# EAGLE board data_proV1.1 (EAGLE 7.6.0)

Size 98.73 x 80 mm. Coordinates in mm from the lower left corner, seen from the top.
Outline: 0,0 98.73,0 98.73,80 0,80 0,0
Copper layers (1*16): Top 0.035mm / dielectric 1.5mm / Bottom 0.035mm
Design rules "default": minimum track width 10mil, minimum drill 24mil, track to track 8mil, track to pad 8mil, pad to pad 8mil, via to via 8mil, smd to smd 8mil, copper to edge 40mil, drill to drill 8mil, minimum pad ring 10mil, minimum via ring 8mil, stop-mask expansion 4mil, vias tented up to drill 0mil, thermal gap 10mil

## Footprints (pad centres in the part's own frame; a part is rotated, then mirrored left to right if it is on the bottom)
CR2032-SMD = smd 5.08 x 5.08: +$1 -12.7,0; +$2 12.7,0 | smd 4.064 x 4.064: - 0,0
C0805 = smd 1.3 x 1.5: 1 -0.95,0; 2 0.95,0
0805 = smd 0.8 x 1.2: 1 -0.9,0; 2 0.9,0
0603-CAP = smd 1.1 x 1: 1 -0.85,0; 2 0.85,0
1206 = smd 1.6 x 1.8: 1 -1.4,0; 2 1.4,0
SOD-323F = smd 1 x 0.8: A -1,0; C 1,0
SMB-DIODE = smd 2.4 x 2.4: A 2.2,0; C -2.2,0
DIL16 = drill 0.813 long: 1 -8.89,-3.81; 2 -6.35,-3.81; 3 -3.81,-3.81; 4 -1.27,-3.81; 5 1.27,-3.81; 6 3.81,-3.81; 7 6.35,-3.81; 8 8.89,-3.81; 9 8.89,3.81; 10 6.35,3.81; 11 3.81,3.81; 12 1.27,3.81; 13 -1.27,3.81; 14 -3.81,3.81; 15 -6.35,3.81; 16 -8.89,3.81
DIL08 = drill 0.813 long: 1 -3.81,-3.81; 2 -1.27,-3.81; 3 1.27,-3.81; 4 3.81,-3.81; 5 3.81,3.81; 6 1.27,3.81; 7 -1.27,3.81; 8 -3.81,3.81
2X20-SHROUDED = drill 1.016 pad 1.88 octagon: 1 -1.27,24.13; 2 1.27,24.13; 3 -1.27,21.59; 4 1.27,21.59; 5 -1.27,19.05; 6 1.27,19.05; 7 -1.27,16.51; 8 1.27,16.51; 9 -1.27,13.97; 10 1.27,13.97; 11 -1.27,11.43; 12 1.27,11.43; 13 -1.27,8.89; 14 1.27,8.89; 15 -1.27,6.35; 16 1.27,6.35; 17 -1.27,3.81; 18 1.27,3.81; 19 -1.27,1.27; 20 1.27,1.27; 21 -1.27,-1.27; 22 1.27,-1.27; 23 -1.27,-3.81; 24 1.27,-3.81; 25 -1.27,-6.35; 26 1.27,-6.35; 27 -1.27,-8.89; 28 1.27,-8.89; 29 -1.27,-11.43; 30 1.27,-11.43; 31 -1.27,-13.97; 32 1.27,-13.97; 33 -1.27,-16.51; 34 1.27,-16.51; 35 -1.27,-19.05; 36 1.27,-19.05; 37 -1.27,-21.59; 38 1.27,-21.59; 39 -1.27,-24.13; 40 1.27,-24.13
BTA = drill 1.4 pad 2.54 square: 1 4.75,9 | drill 1.4 pad 2.54: 2 3.25,6; 3 1.75,9; 4 0.25,6; 5 -1.25,9; 6 -2.75,6 | hole 3.2: 6.45,0; -6.45,0
BTD = drill 1.4 pad 2.54 square: 1 -4.75,6 | drill 1.4 pad 2.54: 2 -3.25,9; 3 -1.75,6; 4 -0.25,9; 5 1.25,6; 6 2.75,9 | hole 3.2: 6.45,0; -6.45,0
2X04 = drill 1.016 octagon: 1 -3.81,-1.27; 2 -3.81,1.27; 3 -1.27,-1.27; 4 -1.27,1.27; 5 1.27,-1.27; 6 1.27,1.27; 7 3.81,-1.27; 8 3.81,1.27
2X04' = drill 1.016 pad 1.676 octagon: 1 -3.81,-1.27; 2 -3.81,1.27; 3 -1.27,-1.27; 4 -1.27,1.27; 5 1.27,-1.27; 6 1.27,1.27; 7 3.81,-1.27; 8 3.81,1.27
JST-2-SMD = smd 1 x 4.6: 1 -1,-3.7; 2 1,-3.7 | smd 1.6 x 3.4: NC1 -3.4,1.5; NC2 3.4,1.5
CDRH2D09 = smd 1.3 x 1.3: P$1 -1.5,0; P$2 1.5,0
CHIP-LED0805 = smd 1.2 x 1.2: A 0,-1.05; C 0,1.05
R0805 = smd 1.3 x 1.5: 1 -0.95,0; 2 0.95,0
R0805' = smd 1.1 x 1.4: 1 -1,0; 2 1,0
0603-RES = smd 1.1 x 1: 1 -0.85,0; 2 0.85,0
SJ_3_PASTE2&3 = smd 0.635 x 1.27: 1 -0.813,0; 2 0,0; 3 0.813,0
TO-92-AMMO = drill 0.813 pad 1.88: 1 -2.54,0; 2 0,0; 3 2.54,0
QFN-10_PAD = smd 0.297 x 0.85: 1 -1,-1.475; 2 -0.5,-1.475; 3 0,-1.475; 4 0.5,-1.475; 5 1,-1.475; 6 1,1.475; 7 0.5,1.475; 8 0,1.475; 9 -0.5,1.475; 10 -1,1.475 | smd 0.7 x 0.28: 11 -1.5,0.25; 12 -1.5,-0.25; 13 1.5,0.25; 14 1.5,-0.25 | smd 2.4 x 1.65: 15 0,0
78XXL = drill 1.016 long: GND 0,-3.81; IN -2.54,-3.81; OUT 2.54,-3.81 | hole 3.302: 0,11.176
SO08-TIGHT = smd 0.6 x 1.2: 1 -1.905,-2.8; 2 -0.635,-2.8; 3 0.635,-2.8; 4 1.905,-2.8; 5 1.905,2.8; 6 0.635,2.8; 7 -0.635,2.8; 8 -1.905,2.8
TC38H = drill 0.813: 1 -1.27,0; 2 1.27,0

## Placement (x,y rotation side)
B1  CR2032  [CR2032-SMD]  62.23,53.34 0 bottom
C1  0.1uFd  [C0805]  33.66,31.11 0 top
C2  0.1uFd  [C0805]  28.57,26.04 0 top
C3  22uF  [0805]  64.77,55.24 0 top
C4  0.1uF  [0603-CAP]  69.85,55.88 0 top
C5  0.1uF  [0603-CAP]  53.34,73.66 0 top
C6  10uF  [1206]  63.5,48.26 180 top
D1  [SOD-323F]  52.07,55.88 0 top
D3  [SMB-DIODE]  49.53,29.84 0 top
IC1  4049N  [DIL16]  17.78,12.7 90 top
IC2  MCP3008  [DIL16]  49.53,19.05 0 top
IC3  OP11S  [DIL16]  78.74,34.29 270 top
IC6  AT24CP  [DIL08]  30.48,52.07 180 top
J1  RASPBERRYPI-40-PIN-GPIO  [2X20-SHROUDED]  57.15,6.35 270 top
J2  [BTA]  101.6,8.89 90 top
J3  [BTA]  101.6,27.94 90 top
J4  [BTA]  101.6,46.99 90 top
J5  [BTA]  101.6,66.04 90 top
J6  [BTD]  -2.54,8.89 270 top
J7  [BTD]  -2.54,27.94 270 top
J8  [BTD]  -2.54,46.99 270 top
J9  [BTD]  -2.54,66.04 270 top
JP1  [2X04]  19.05,67.31 180 top
JP2  [2X04']  36.83,67.31 0 top
JP3  JST  [JST-2-SMD]  69.85,74.93 0 top
L1  4.7uH, 1.2A  [CDRH2D09]  74.93,66.04 270 top
LED1  [CHIP-LED0805]  71.12,15.24 0 top
R1  1k  [R0805]  66.04,35.56 0 top
R2  1k  [R0805]  66.04,41.91 0 top
R3  1k  [R0805]  66.04,29.21 0 top
R4  1k  [R0805]  87.63,33.02 270 top
R5  1k  [R0805]  87.63,46.99 180 top
R6  1k  [R0805]  78.74,15.24 180 top
R7  1k  [R0805]  87.63,25.4 270 top
R8  1k  [R0805]  87.63,39.37 0 top
R9  4.7k  [R0805]  49.53,60.96 0 top
R10  N/A?  [R0805']  24.13,41.91 180 top
R11  3.3k  [R0805']  24.13,35.56 180 top
R12  200  [R0805']  40.64,34.29 90 top
R13  1.5M  [R0805']  52.07,44.45 0 top
R14  510K  [R0805']  49.53,38.1 180 top
R15  3.3k  [R0805']  43.18,43.18 0 top
R16  3.3k  [R0805']  43.18,50.8 0 top
R17  1k  [R0805']  71.12,21.59 270 top
R18  2M  [0603-RES]  71.12,60.96 180 top
R19  220k  [0603-RES]  60.96,73.66 0 top
R20  1.2M  [0603-RES]  58.42,58.42 0 top
R21  220k  [0603-RES]  57.15,69.85 270 top
R22  2M  [0603-RES]  64.77,59.69 0 top
SJ1  [SJ_3_PASTE2&3]  58.42,63.5 0 top
U1  DS18B20  [TO-92-AMMO]  49.53,67.31 0 top
U2  TPS61200  [QFN-10_PAD]  63.5,66.04 90 top
U$1  V_REG_LD1117VXX  [78XXL]  82.55,64.77 0 top
U$2  DS1307SO8-TIGHT  [SO08-TIGHT]  34.29,40.64 90 top
X1  32.768khz  [TC38H]  16.51,53.34 180 top

## Library data of the parts
B1 D1 IC2 JP2 R10-R17 = adafruit
C1 C2 R1-R9 = resistor
C3 C6 = CH_passive
C4 C5 JP3 L1 R18-R22 SJ1 U2 = SparkFun
D3 = SparkFun-DiscreteSemi; PROD_ID: DIO-09646
IC1 = 40xx
IC3 = linear
IC6 = atmel; MPN: AT24C1024BW-SH-B; OC_FARNELL: 1362646; OC_NEWARK: 03P2044
J1 = SparkFun-Boards
J2-J9 = SparkFun-Connectors
JP1 = pinhead
LED1 = led
U1 = SparkFun-Sensors; STORE_ID: SEN-00245
U$1 = SparkFun-PowerIC
U$2 = SparkFun-FreqCtrl; PROD_ID: IC-08138
X1 = crystal; OC_FARNELL: unknown; OC_NEWARK: unknown

## Nets
3.3V: D1.C IC6.8 J1.1 J1.17 JP1.2 JP2.3 JP2.5 JP2.7 R20.1 SJ1.1 U1.3 U$1.GND
5V: C1.1 C2.1 IC2.15 IC2.16 J1.2 J1.4 J2.5 J3.5 J4.5 J5.5 J6.4 J7.4 J8.4 J9.4 R10.2 R11.2 R12.2 R15.1 R16.1 R22.1 SJ1.3 U$1.OUT U$2.8
A1: IC2.1 IC3.1 R2.2
A2: IC2.2 IC3.7 R6.2
A3: IC2.3 IC3.10 R7.2
A4: IC2.4 IC3.16 R8.2
BATT: R13.2 R14.1 U$2.3
CE: J1.22 JP1.3
CSN: IC2.10 J1.24 JP1.4
D1: IC1.2 J1.29
D2: IC1.4 J1.31
D3: IC1.6 J1.32
D4: IC1.10 J1.33
DQ: D1.A J1.13 R9.1
FB: R21.2 SJ1.2 U2.10
GND: B1.- C1.2 C2.2 C3.2 C5.2 C6.2 IC2.9 IC2.14 IC6.1 IC6.2 IC6.3 IC6.4 IC6.7 J1.6 J1.9 J1.14 J1.20 J1.25 J1.30 J1.34 J1.39 J2.2 J3.2 J4.2 J5.2 J6.5 J7.5 J8.5 J9.5 JP2.2 R1.1 R3.1 R4.1 R5.1 R13.1 R17.1 R19.1 R21.1 U1.1 U$1.IN U$2.4
MISO: IC2.12 J1.21 JP1.7
MOSI: IC2.11 J1.19 JP1.6
N$1: U$2.2 X1.1
N$2: R10.1 U$2.1 X1.2
N$3: B1.+$1 B1.+$2 D3.C R14.2
N$4: J1.7 LED1.A
N$5: IC3.2 R1.2 R2.1
N$6: R9.2 U1.2
N$7: IC3.15 R5.2 R8.1
N$8: IC3.6 R3.2 R6.1
N$9: L1.P$1 U2.3
N$10: D3.A R12.1
N$11: IC1.3 J6.1 J6.2 J6.3 J6.6
N$12: IC1.5 J7.1 J7.2 J7.3 J7.6
N$13: C5.1
N$14: IC1.7 J8.1 J8.2 J8.3 J8.6
N$15: IC1.9 J9.1 J9.2 J9.3 J9.6
N$16: IC3.11 R4.2 R7.1
N$17: LED1.C R17.2
RX: J1.10 JP2.8
S1-5V1: IC3.5 J2.1
S1-5V2: IC3.12 J3.1
S1-5V3: IC3.3 J5.1
S1-5V4: IC3.14 J4.1
S$1: R22.2
S$3: JP3.1
S$5: C4.2 R18.1
S$7: JP3.2
SCK: IC2.13 J1.23 JP1.5
SCL: IC6.6 R16.2 U$2.6
SDA: IC6.5 R15.2 U$2.5
SQ: R11.1 U$2.7
TX: J1.8 JP2.1
UVLO: R19.2 U2.7
V+: IC3.4
V-: IC3.13
VCC: C3.1 R20.2
VDD: IC1.1
VIN: C4.1 C6.1 R18.2 U2.5 U2.6
VSS: IC1.8

## Tracks (layer width: path | path; a pad name or v marks a point on that pad's centre or on a via)
3.3V  (11 unrouted)
5V  (22 unrouted)
A1  (2 unrouted)
A2  (2 unrouted)
A3  (2 unrouted)
A4  (2 unrouted)
BATT  (2 unrouted)
CE  (1 unrouted)
CSN  (2 unrouted)
D1  (1 unrouted)
D2  (1 unrouted)
D3  (1 unrouted)
D4  (1 unrouted)
DQ  (2 unrouted)
FB  (2 unrouted)
GND  (40 unrouted)
MISO  (2 unrouted)
MOSI  (2 unrouted)
N$1  (1 unrouted)
N$2  (2 unrouted)
N$3  (3 unrouted)
N$4  (1 unrouted)
N$5  (2 unrouted)
N$6  (1 unrouted)
N$7  (2 unrouted)
N$8  (2 unrouted)
N$9  (1 unrouted)
N$10  (1 unrouted)
N$11  (4 unrouted)
N$12  (4 unrouted)
N$14  (4 unrouted)
N$15  (4 unrouted)
N$16  (2 unrouted)
N$17  (1 unrouted)
RX  (1 unrouted)
S1-5V1  (1 unrouted)
S1-5V2  (1 unrouted)
S1-5V3  (1 unrouted)
S1-5V4  (1 unrouted)
S$5  (1 unrouted)
SCK  (2 unrouted)
SCL  (2 unrouted)
SDA  (2 unrouted)
SQ  (1 unrouted)
TX  (1 unrouted)
UVLO  (1 unrouted)
VCC  (1 unrouted)
VIN  (4 unrouted)